# Altium PCB FEU-102-1_part5.PcbDoc
Units mm, origin at the board's own origin, x right, y up, seen from the top; angles counter-clockwise.
Board outline 20 x 20 mm, 2 copper layers (Top Layer, Bottom Layer), stack 1.021 mm thick; 7 components, 18 nets, 16 pads, 0 vias.
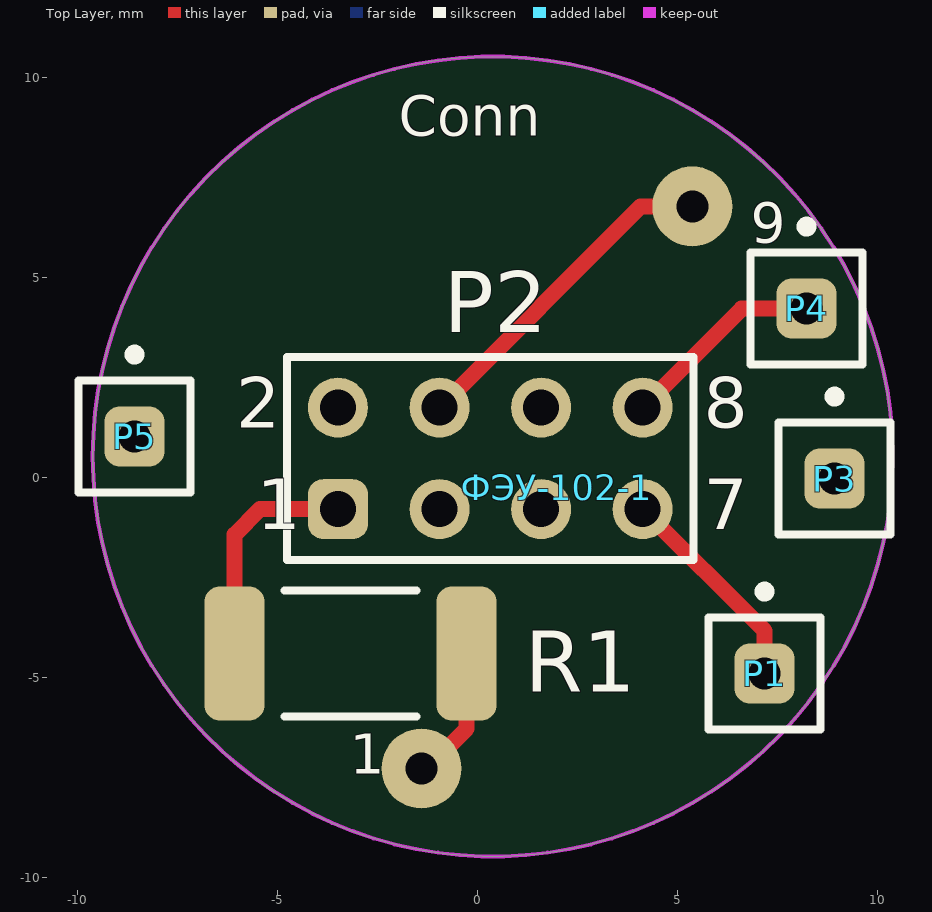
[diagram p0: Top Layer view]
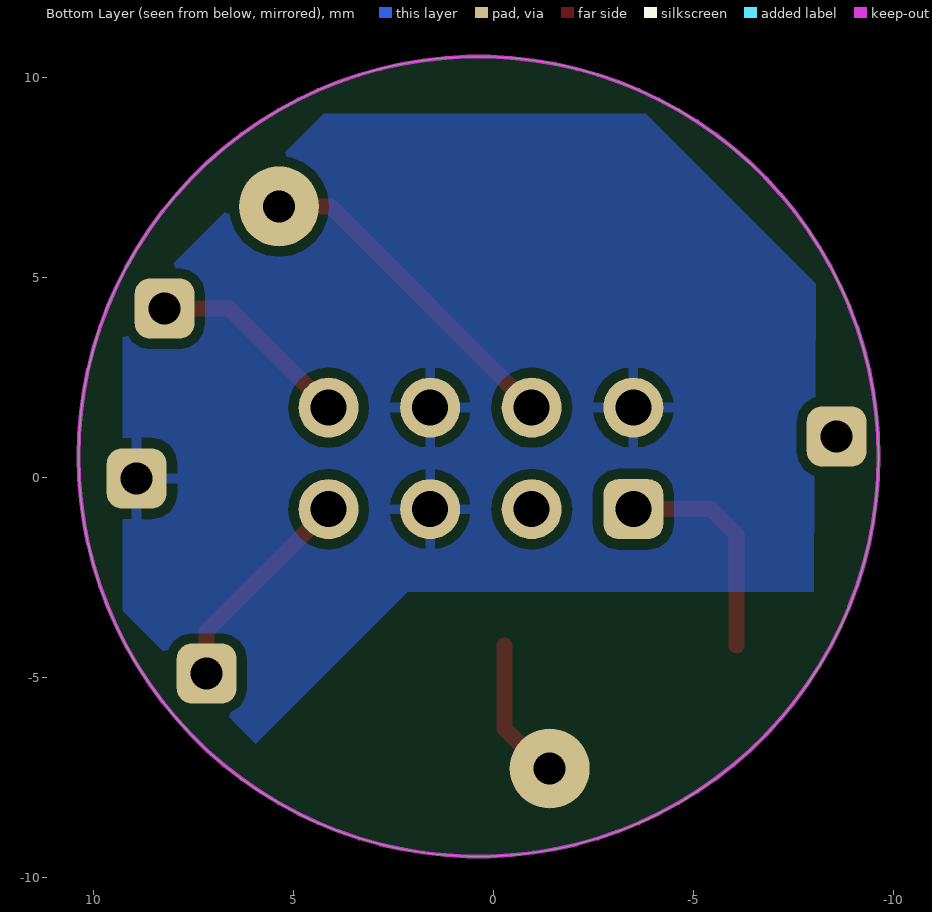
[diagram p1: Bottom Layer view, seen from below]

## Layer stack, top to bottom
Top Solder: solder mask 0.0102, Solder Resist, Dk 3.5
Top Layer: signal copper 0.0356
Dielectric1: dielectric 0.95, FR-4, Dk 4.8
Bottom Layer: signal copper 0.0356
Bottom Solder: solder mask 0.0102, Solder Resist, Dk 3.5

## Board outline
-9.62,0.526 ccw(c0.38,0.526) 0.38,-9.474 ccw(c0.38,0.526) 10.38,0.526 ccw(c0.38,0.526) 0.38,10.526 ccw(c0.38,0.526)

## Design rules (kind name [scope] priority, off if disabled: settings)
Clearance [All] p1: gap=0.25
ComponentClearance [All] p1: gap=0.1 collisioncheckmode=3 verticalgap=0.254 showdistances=TRUE
HoleSize [All] p1: absolutevalues=TRUE maxlimit=2.54 minlimit=0.3 maxpercent=80.000 minpercent=20.000
HoleToHoleClearance [All] p1: gap=0.152 allowstackedmicrovias=TRUE
MinimumAnnularRing [All] p1: minimumring=0.2
MinimumSolderMaskSliver [All] p1: minsoldermaskwidth=0.152
PlaneClearance [All] p1: clearance=2
PlaneConnect [All] p1: planeconnectstyle=Relief reliefexpansion=0.457 reliefentries=4 reliefconductorwidth=0.3 reliefairgap=0.457
PolygonConnect PolygonConnect_via [IsVia] p1: connectstyle=Direct reliefconductorwidth=0.254 reliefentries=4 polygonreliefangle="90 Angle" airgapwidth=0.254
PolygonConnect [All] p2: connectstyle=Relief reliefconductorwidth=0.254 reliefentries=4 polygonreliefangle="90 Angle" airgapwidth=0.254
RoutingVias [All] p1: holewidth=0.3 width=0.62 viastyle="Through Hole" minholewidth=0.3 minwidth=0.62 maxholewidth=6 maxwidth=4
SilkToSilkClearance [All] p1: silktosilkclearance=0.152
SilkToSolderMaskClearance SilkscreenOverComponentPads [IsPad] p1: minsilkscreentomaskgap=0.1 clearancetoexposedcopper=TRUE
SolderMaskExpansion [All] p1: expansion=0.1
Width [All] p1: maxlimit=2.254 minlimit=0.3 preferedwidth=0.4
22 further rules are at their usual default settings.

## Components (designator, comment, footprint, x,y, rotation, side; value= is the part's Value field where it differs from the comment)
P1 "Plug" PIN1 7.175,-4.9 r0 top
P2 "Header 4X2" HDR2X4 -3.49,-0.79 r0 top locked
P3 "Plug" PIN1 8.925,-0.025 r0 top
P4 "Plug" PIN1 8.225,4.225 r0 top
P5 "Plug" PIN1 -8.575,1.025 r0 top
R1 "5G" HVF2512T5007FE -6.325,-2.725 r180 top
ФЭУ-102-1 "Header 7X2" ФЭУ-102 0.38,0.526 r0 top locked

## Footprints (in the part's own frame and the unit in brackets; to place one, negate y for a bottom-side part, rotate by r counter-clockwise, add the part's x,y. Pads: shape width x height; smd on the part's side, far side on the other; paste and mask are expansions set on the pad)
HDR2X4 [mm] "Connector; Header; 4x2 Position"
  rrect50% 1.5x1.5 hole 0.9: 1(0,0)
  round 1.5 hole 0.9: 2(0,2.54) 3(2.54,0) 4(2.54,2.54) 5(5.08,0) 6(5.08,2.54) 7(7.62,0) 8(7.62,2.54)
  silkscreen extent -1.27,-1.27 8.89,3.81
HVF2512T5007FE [mm] "Chip Resistor, 2-Leads, Body 7,31x3,20mm, IPC Low Density"
  rrect50% 1.5x3.35 smd: 1(-6.05,1.675) 2(-0.25,1.675)
  silkscreen extent -4.8,0.1 -1.5,3.25, body extent -6.8,0.08 0.51,3.27, height 0.82
PIN1 [mm] "Connector; Plug"
  rrect50% 1.5x1.5 hole 0.8: 1(0,0)
  silkscreen extent -1.4,-1.4 1.4,2.17
ФЭУ-102 [mm]
  round 2 hole 0.8: 1(-1.78,-7.799) 9(4.988,6.255)
  Keep-Out Layer circle w0.1: c0,0 r10

## Part data
P2: "Header, 4-Pin, Dual row"
R1: library part "Resistor 0805"
ФЭУ-102-1: "Header, 7-Pin, Dual row"

## Nets (pads, with @x,y where several pads share a name; then routed paths per layer and width w, separated by ;. In a path a pad name is that pad's centre, name@x,y a point inside that pad or via, vN(x,y) a via of type N, cw(c..) or ccw(c..) an arc to the next point about the centre after c; other vN are vias at no path point)
ANODE: P2.4 ФЭУ-102-1.9 | length 8.4
  Top Layer w0.4: P2.4 4.08,6.78 ФЭУ-102-1.9
DINODE1: 
DINODE2: 
DINODE3: 
DINODE4: 
DINODE5: 
DINODE6: 
DINODE7: 
DINODE8: 
DINODE9: 
DINODE10: 
DINODE11: 
DINODE12: 
FOTOKAT: R1.1 ФЭУ-102-1.1 | length 3.6
  Top Layer w0.4: ФЭУ-102-1.1 -1.274,-7.274 -0.275,-6.275 R1.1 R1.1@-0.275,-4.2
GND: P2.2 P2.5 P2.6 P3.1
NetP2_1: P2.1 R1.2 | length 5.6
  Top Layer w0.4: R1.2@-6.075,-4.2 -6.075,-1.425 -5.44,-0.79 P2.1
PULSE: P2.8 P4.1 | length 5.1
  Top Layer w0.4: P2.8 6.605,4.225 P4.1
VCC: P1.1 P2.7 | length 5.4
  Top Layer w0.4: P2.7 7.175,-3.835 P1.1
pads on no net: P2.3 P5.1

## Polygon pours and split planes (outlines as drawn)
GND on Bottom Layer "Bottom Layer-No Net" (solid, pour order 4): -8.05,4.85 -3.8,9.1 4.25,9.1 9.275,4.075 9.275,3 9.275,-3.325 5.95,-6.65 2.15,-2.85 -8,-2.85

## Silkscreen, mask and mechanical layers (free items; w line width, h text height)
Top Overlay:
  text "Conn" at -1.975,8.55 h1
  text "9" at 6.825,5.875 h1
  text "1" at -3.2,-7.4 h1

## Text inside footprints (layer, text, board x,y; h text height)
P2: Top Overlay "2" at -6.03,1.242 h1.27; Top Overlay "1" at -5.522,-1.298 h1.27; Top Overlay "7" at 5.654,-1.298 h1.27; Top Overlay "8" at 5.654,1.242 h1.27